# EAGLE board Bring_It_On (EAGLE 9.4.2)
REV: D
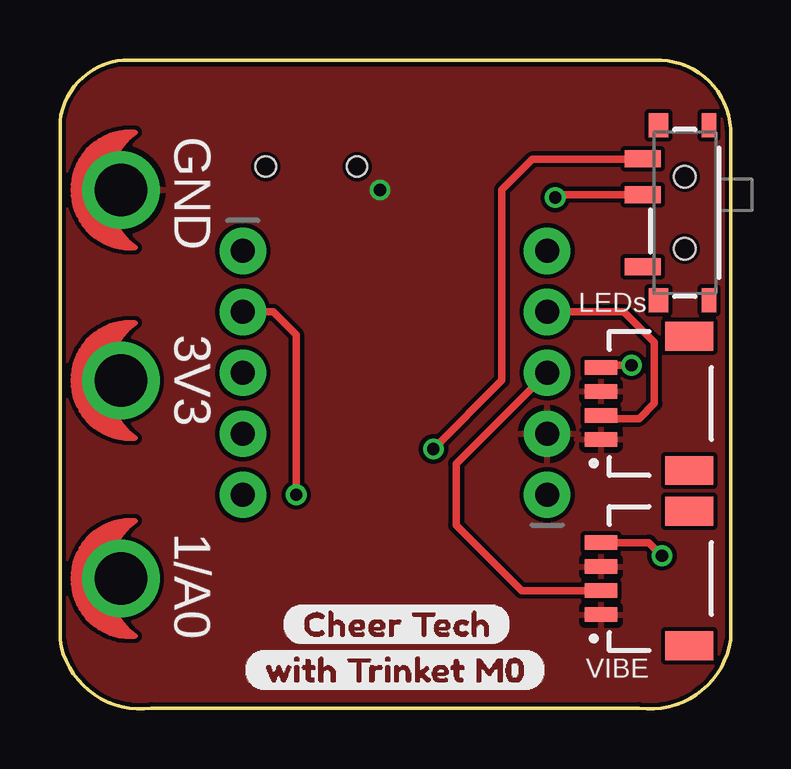
[diagram p0: board, top side]
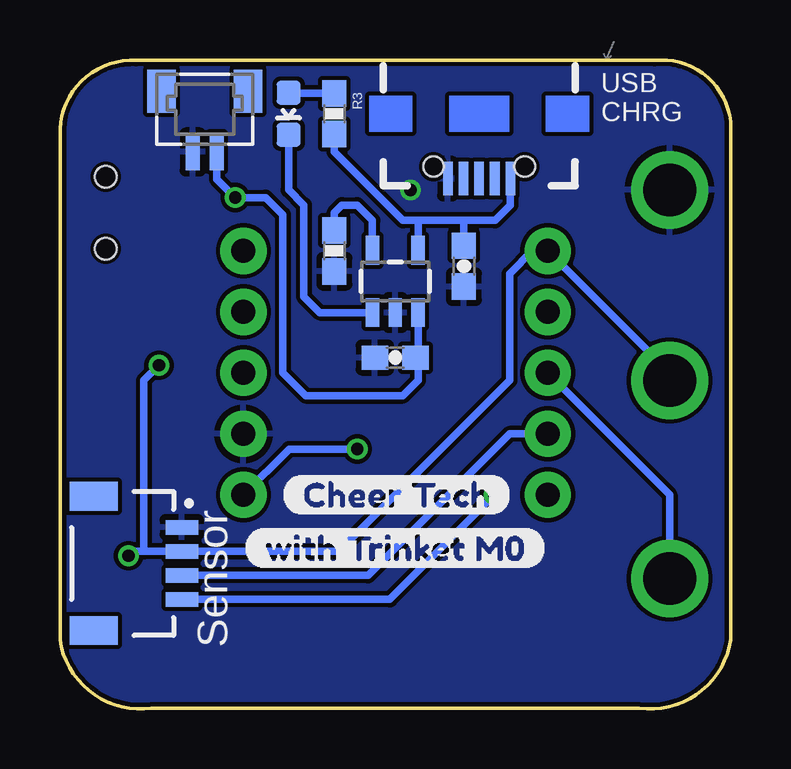
[diagram p1: board, bottom side, seen from below]

Size 27.94 x 27.04 mm. Coordinates in mm from the lower left corner, seen from the top.
Outline: 0,2.89 0,24.48 arc-90 3.17,27.02 24.77,27.02 arc-90 27.94,24.16 27.94,2.89 arc-90 24.13,0.03 3.81,0.03 arc-90 0,2.89
Copper layers (1*16): Top 0.035mm / dielectric 1.5mm / Bottom 0.035mm
Design rules "SparkFun-2-layer-TIGHT": minimum track width 7mil, minimum drill 15mil, track to track 7mil, track to pad 7mil, pad to pad 7mil, via to via 7mil, smd to smd 7mil, copper to edge 7mil, drill to drill 7mil, minimum pad ring 7mil, minimum via ring 7mil, stop-mask expansion 4mil, vias tented up to drill 25mil, thermal gap 10mil
Net classes: 1 power: width 0.305 mm

## Footprints (pad centres in the part's own frame; a part is rotated, then mirrored left to right if it is on the bottom)
0603-CAP = smd 1.1 x 1: 1 -0.85,0; 2 0.85,0
LED-0603 = smd 1 x 1: A 0,-0.877; C 0,0.877
PETAL-SMALL = drill 2.2: 1 0,0
JST04_1MM_RA = smd 0.6 x 1.35: 1 -1.5,0; 2 -0.5,0; 3 0.5,0; 4 1.5,0 | smd 1.2 x 2: NC1 2.8,-3.675; NC2 -2.8,-3.675
1X05_ROUND_76 = drill 1 pad 1.93: 1 -5.08,0; 2 -2.54,0; 3 0,0; 4 2.54,0; 5 5.08,0
USB-AB-MICRO-SMD_V03 = smd 1.4 x 0.4: D+1 2.7,0; D-1 2.7,0.65; GND1 2.7,-1.3; ID1 2.7,-0.65; VBUS1 2.7,1.3 | hole 0.85: 2.2,1.9; 2.2,-1.9
0603-RES = smd 1.1 x 1: 1 -0.85,0; 2 0.85,0
SWITCH_SPST_SMD_A = smd 0.7 x 1.5: 1 -2.25,-1.75; 2 -0.75,-1.75; 3 2.25,-1.75 | smd 1 x 0.6: GND1 -3.65,1; GND3 3.65,1 | smd 1 x 0.8: GND2 -3.65,-1.1; GND4 3.65,-1.1 | hole 0.9: -1.5,0; 1.5,0
SOT23-5 = smd 0.55 x 1.2: 1 -0.95,-1.3; 2 0,-1.3; 3 0.95,-1.3; 4 0.95,1.3; 5 -0.95,1.3
BM02B-SRSS-TB = smd 0.6 x 1.55: 1 0.5,0; 2 -0.5,0 | smd 1.2 x 1.8: M1 1.8,-2.525; M2 -1.8,-2.525

## Placement (x,y rotation side)
C3  4.7uF  [0603-CAP]  11.11,18.45 270 bottom
C4  4.7uF  [0603-CAP]  13.97,14.64 180 bottom
D11  RED  [LED-0603]  18.41,24.8 180 bottom
FRAME1  FRAME-LETTERNO_PACKAGE  [DUMMY]  83.82,55.28 0 top  (outside the outline)
J1  SEWTAP_SMALL  [PETAL-SMALL]  2.54,5.43 270 top
J2  QWIIC_RIGHT_ANGLE  [JST04_1MM_RA]  22.54,5.43 90 top
J5  SEWTAP_SMALL  [PETAL-SMALL]  2.54,13.68 270 top
J8  SEWTAP_SMALL  [PETAL-SMALL]  2.54,21.62 270 top
J9  QWIIC_RIGHT_ANGLE  [JST04_1MM_RA]  22.86,6.06 270 bottom
J10  QWIIC_RIGHT_ANGLE  [JST04_1MM_RA]  22.54,12.73 90 top
JP3  [1X05_ROUND_76]  20.29,14 90 top
JP4  [1X05_ROUND_76]  7.62,14 270 top
JP9  Micro USB  [USB-AB-MICRO-SMD_V03]  10.48,24.8 270 bottom
R3  330  [0603-RES]  16.51,24.8 270 bottom
R4  2.0k  [0603-RES]  16.51,19.08 270 bottom
S1  [SWITCH_SPST_SMD_A]  26.04,20.67 270 top
U1  MCP73831  [SOT23-5]  13.97,17.81 0 bottom
U$3  [CHEER_TECH0]  9.21,3.52 0 top
U$4  [WITH_TRINKET_M01]  7.62,1.62 0 top
U$6  [CHEER_TECH0]  18.73,8.92 0 bottom
U$7  [WITH_TRINKET_M01]  20.32,6.7 0 bottom
X1  BM02B-SRSS-TB  [BM02B-SRSS-TB]  21.91,23.21 180 bottom

## Library data of the parts
C3 C4 = SparkFun-Capacitors; PROD_ID: CAP-08280
D11 = SparkFun-LED; PROD_ID: DIO-00819
FRAME1 = SparkFun-Aesthetics; DESIGNER: Nobody; VERSION: v01
J1 J5 J8 = LilyPad-Wearables
J2 J9 J10 = JSTSHBatteryConnector; PROD_ID: CONN-13694
JP3 JP4 = microbuilder
JP9 = SparkFun-Connectors; PROD_ID: CONN-11794
R3 = SparkFun-Resistors; PROD_ID: RES-00818
R4 = SparkFun-Resistors; PROD_ID: RES-08296
S1 = SparkFun-Switches; PROD_ID: SWCH-10651; SF_SKU: COM-10860
U1 = SparkFun-PowerIC; PROD_ID: IC-09995
U$3 U$4 U$6 U$7 = buzzard_labels (16)
X1 = con-JST SH

## Nets
3.3V: J2.4 J5.1 J9.2 J10.4 JP4.1
D1_A0_PA02: J1.1 JP4.3
GND: C3.2 C4.2 J2.1 J2.3 J8.1 J9.1 J10.1 J10.3 JP3.2 JP9.GND1 R4.2 U1.2 X1.1
N$3: D11.A R3.1
NEO: J10.2 JP3.4
PROG: R4.1 U1.5
SCL: J9.4 JP4.2
SDA: J9.3 JP4.4
STAT: D11.C U1.1
VBAT: JP3.1 S1.1
VBAT_OUT: C4.1 S1.2 U1.3 X1.2
VIBE: J2.2 JP3.3
VUSB: C3.1 JP9.VBUS1 R3.2 U1.4

## Tracks (layer width: path | path; a pad name or v marks a point on that pad's centre or on a via)
3.3V  (via drill 0.51)
  Top 0.305: J2.4 24.54,6.93 v25.08,6.38 | J10.4 22.63,14.32 v23.81,14.32
  Bottom 0.305: J5.1 2.54,14 JP4.1 8.26,19.08 9.21,18.13 9.21,13.68 16.33,6.56 J9.2 24.45,6.56 | 24.45,6.56 24.9,6.56 v25.08,6.38 | v23.81,14.32 24.45,13.68 24.45,6.56
D1_A0_PA02
  Bottom 0.305: JP4.3 2.54,8.92 J1.1
GND  (via drill 0.51)
  other vias: 13.34,21.62
  pour Top: 0,27.02 27.94,27.02 27.94,0.03 0,0.03
  pour Bottom: 0,27.02 27.94,27.02 27.94,0.03 0,0.03
N$3
  Bottom 0.305: R3.1 18.39,25.65 D11.A
NEO
  Top 0.305: J10.2 22.68,12.1 24.13,12.1 24.77,12.73 24.77,15.27 23.5,16.54 JP3.4
PROG
  Bottom 0.305: U1.5 14.92,20.35 15.56,20.99 16.19,20.99 16.51,20.67 R4.1
SCL  (via drill 0.51)
  Top 0.305: JP4.2 8.89,16.54 9.84,15.59 v9.84,8.92
  Bottom 0.305: J9.4 14.2,4.56 v9.84,8.92
SDA
  Bottom 0.305: JP4.4 9.21,11.46 15.11,5.56 J9.3
STAT
  Bottom 0.305: D11.C 18.41,21.62 17.78,20.99 17.78,17.18 17.11,16.51 U1.1
VBAT  (via drill 0.51)
  Top 0.305: S1.1 24.26,22.89 19.68,22.89 18.41,21.62 18.41,13.68 v15.56,10.83
  Bottom 0.305: v15.56,10.83 18.39,10.83 JP3.1
VBAT_OUT  (via drill 0.51)
  Top 0.305: S1.2 20.75,21.42 v20.64,21.3
  Bottom 0.305: U1.3 13.02,14.74 C4.1 13.02,14.53 13.02,13.68 13.65,13.05 17.7,13.05 18.66,14 18.66,20.59 19.37,21.3 v20.64,21.3 21.41,22.07 X1.2
VIBE
  Top 0.305: J2.2 19.23,4.93 16.51,7.65 16.51,10.22 JP3.3
VUSB
  Bottom 0.305: U1.4 13.02,20.35 | 11.11,20.35 9.81,20.35 9.18,20.99 JP9.VBUS1 | 11.11,20.35 13.02,20.35 | 13.02,20.35 13.65,20.35 16.51,23.21 R3.2 | C3.1 11.11,20.35

## Text on the board
tPlace: GND | LEDs | 3V3 | 1/A0 | VIBE
bPlace: USB / CHRG | Sensor